# EAGLE board riffle101var (EAGLE 7.2.0), part 1 of 2
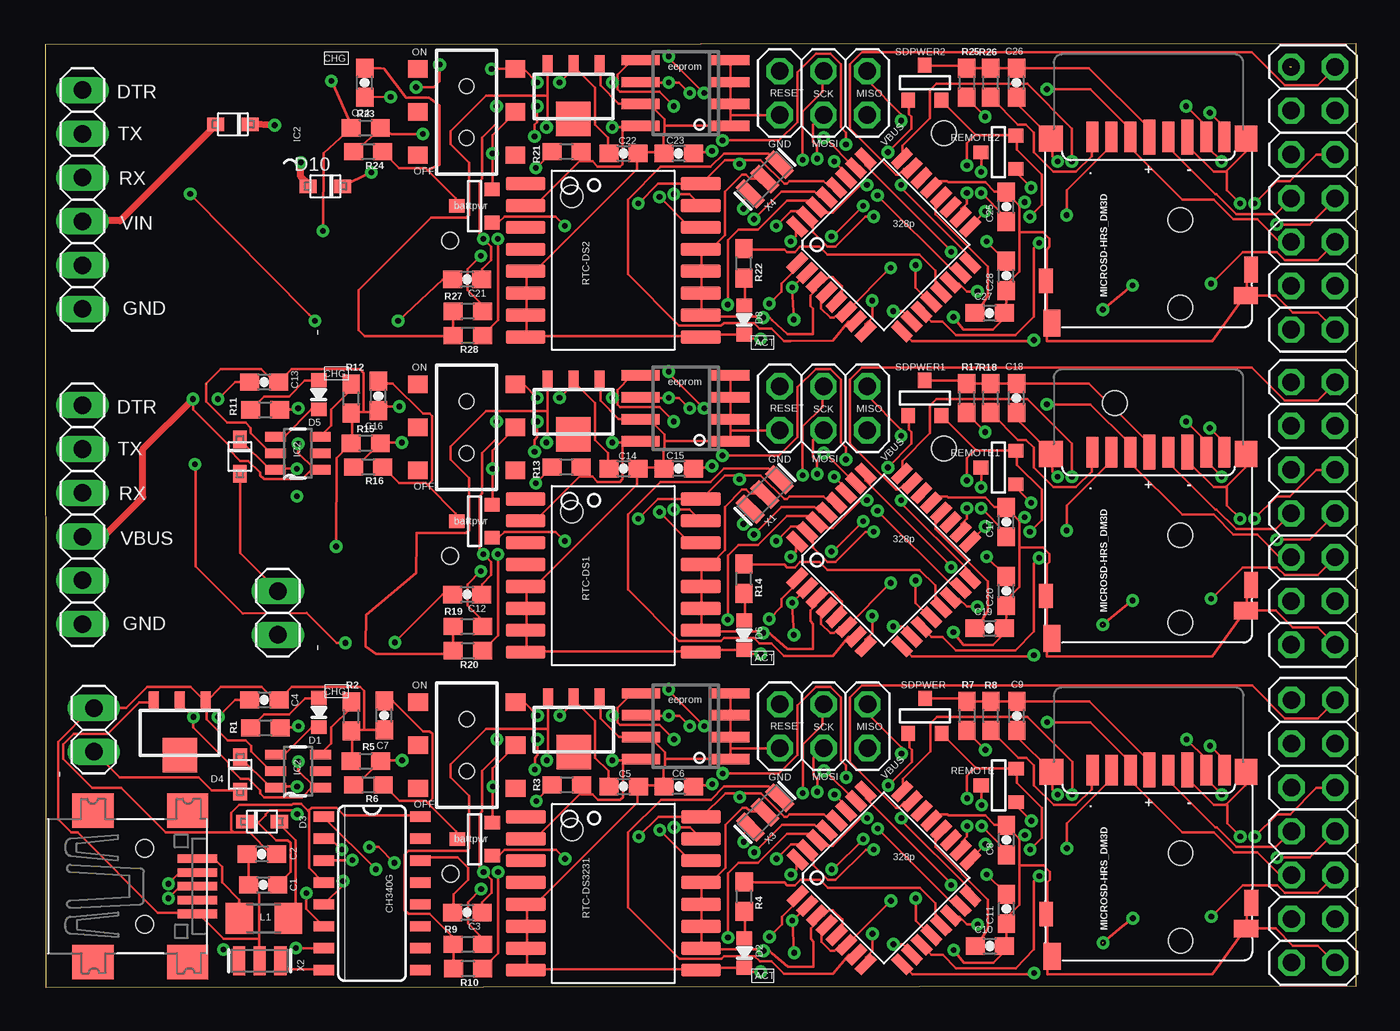
[diagram p0: board, top side]
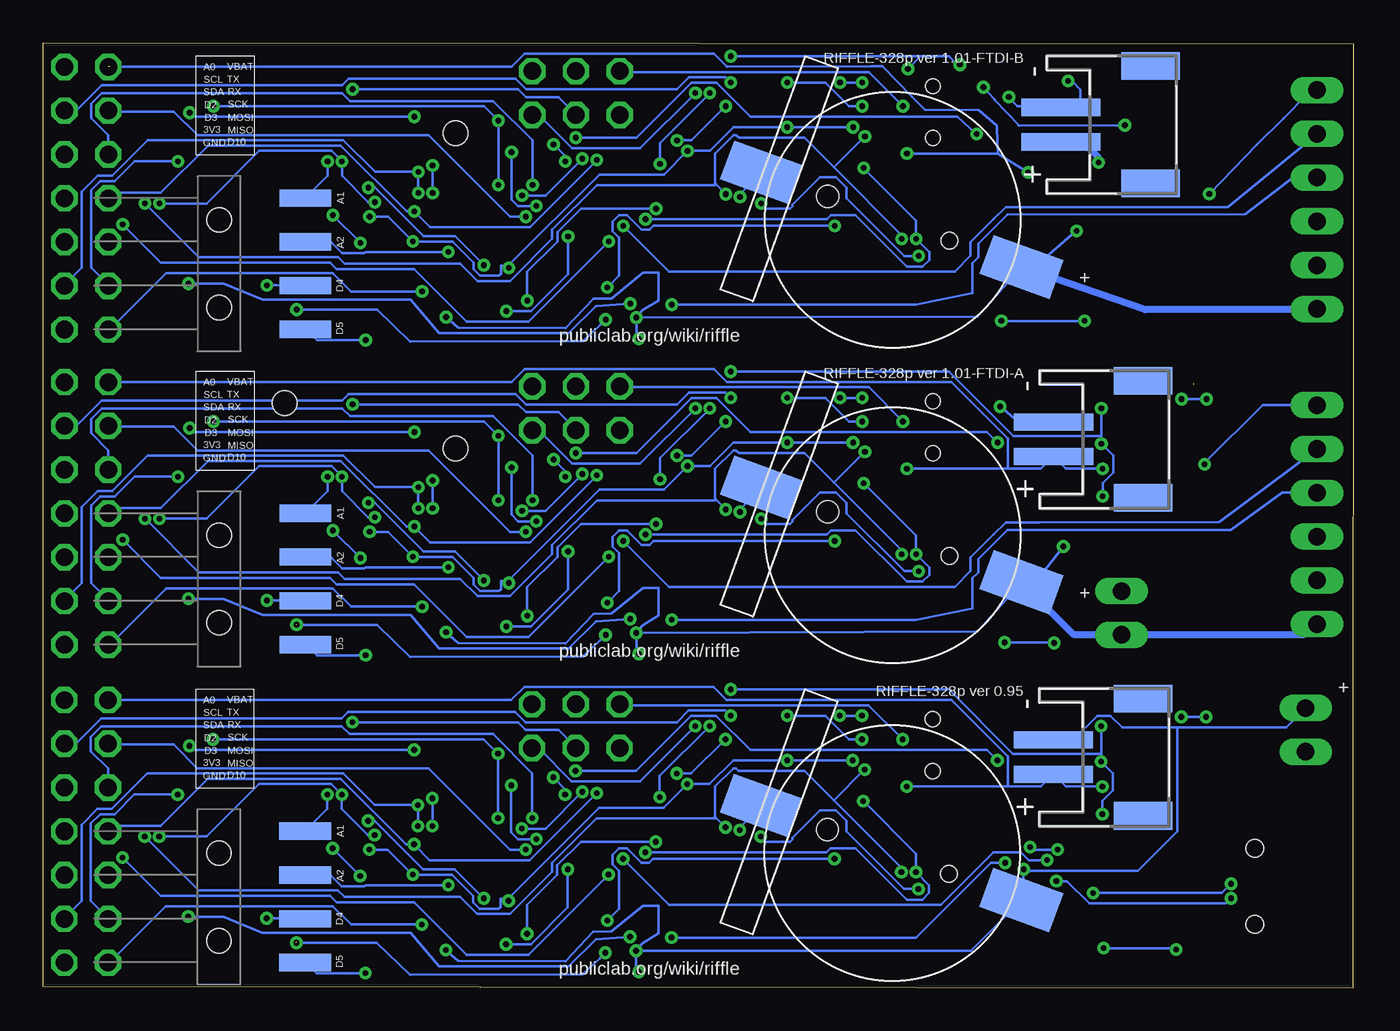
[diagram p1: board, bottom side, seen from below]

Size 76.03 x 54.79 mm. Coordinates in mm from the lower left corner, seen from the top.
Outline: 0,54.73 0.03,0 76.03,0.06 76.03,54.79
Outline: 0.01,54.73 76.01,54.79
Copper layers (1*16): Top 0.035mm / dielectric 1.5mm / Bottom 0.035mm
Design rules "default": minimum track width 10mil, minimum drill 24mil, track to track 8mil, track to pad 8mil, pad to pad 8mil, via to via 8mil, smd to smd 8mil, copper to edge 40mil, drill to drill 8mil, minimum pad ring 10mil, minimum via ring 8mil, stop-mask expansion 4mil, vias tented up to drill 0mil, thermal gap 10mil
Holes 1.4 mm at 62.01,33.91 52.1,31.27 52.1,49.56

## Footprints (pad centres in the part's own frame; a part is rotated, then mirrored left to right if it is on the bottom)
BATTCON_12MM_SMT = smd 2.4 x 4.3: P$1 0,11.96 | smd 2.4 x 4.2: P$2 0,-4.1 | hole 0.95: 0,7.5 | hole 1.25: 0,0
SOT-23 = smd 0.787 x 0.889: 1 0.025,-1.016; 2 -0.94,1.016; 3 0.991,1.016
0603-CAP = smd 1.1 x 1: 1 -0.85,0; 2 0.85,0
JST-PH-2-SMT-RA = smd 1 x 4.6: 1 1,-3.7; 2 -1,-3.7 | smd 1.6 x 3.4: NC1 -3.4,1.5; NC2 3.4,1.5
USB-MINIB = smd 0.5 x 2.308: D+ 0,4.064; D- -0.8,4.064; GND 1.6,4.064; ID 0.8,4.064; VBUS -1.6,4.064 | smd 2 x 2.4: GND1 -4.4,-2; GND2 -4.4,3.5; GND3 4.4,3.5; GND4 4.4,-2 | hole 1: -2.2,1; 2.2,1
0603-LED = smd 0.8 x 0.9: MINUS -0.85,0; PLUS 0.85,0
SOD-323F = smd 1 x 0.8: A -1,0; C 1,0
TQFP32-08 = smd 1.27 x 0.559: 1 -4.293,2.8; 2 -4.293,2; 3 -4.293,1.2; 4 -4.293,0.4; 5 -4.293,-0.4; 6 -4.293,-1.2; 7 -4.293,-2; 8 -4.293,-2.8; 17 4.293,-2.8; 18 4.293,-2; 19 4.293,-1.2; 20 4.293,-0.4; 21 4.293,0.4; 22 4.293,1.2; 23 4.293,2; 24 4.293,2.8 | smd 0.559 x 1.27: 9 -2.8,-4.293; 10 -2,-4.293; 11 -1.2,-4.293; 12 -0.4,-4.293; 13 0.4,-4.293; 14 1.2,-4.293; 15 2,-4.293; 16 2.8,-4.293; 25 2.8,4.293; 26 2,4.293; 27 1.2,4.293; 28 0.4,4.293; 29 -0.4,4.293; 30 -1.2,4.293; 31 -2,4.293; 32 -2.8,4.293
SOT23-5 = smd 0.55 x 1.2: 1 -0.95,-1.3; 2 0,-1.3; 3 0.95,-1.3; 4 0.95,1.3; 5 -0.95,1.3; 6 0,1.3
SO16 = smd 0.6 x 1.2: 1 -4.445,-2.8; 2 -3.175,-2.8; 3 -1.905,-2.8; 4 -0.635,-2.8; 5 0.635,-2.8; 6 1.905,-2.8; 7 3.175,-2.8; 8 4.445,-2.8; 9 4.445,2.8; 10 3.175,2.8; 11 1.905,2.8; 12 0.635,2.8; 13 -0.635,2.8; 14 -1.905,2.8; 15 -3.175,2.8; 16 -4.445,2.8
SOT89 = smd 0.58 x 1.2: 1 -1.5,-1.8; 2 0,-1.8; 3 1.5,-1.8 | smd 2 x 2: 4 0,1.3
SO-08 = smd 0.6 x 2.2: 1 -1.905,-2.6; 2 -0.635,-2.6; 3 0.635,-2.6; 4 1.905,-2.6; 5 1.905,2.6; 6 0.635,2.6; 7 -0.635,2.6; 8 -1.905,2.6
2X03 = drill 1.016 octagon: 1 -2.54,-1.27; 2 -2.54,1.27; 3 0,-1.27; 4 0,1.27; 5 2.54,-1.27; 6 2.54,1.27
AYZ0202 = smd 1 x 1.15: 1 -2.5,2.825; 2 0,2.825; 3 2.5,2.825; 4 -2.5,-2.825; 5 0,-2.825; 6 2.5,-2.825 | hole 0.85: 1.5,0; -1.5,0
1X02 = drill 1.016 long: 1 -1.27,0; 2 1.27,0
1X04-SMD = smd 1 x 3: 1 -3.81,5; 2 -1.27,5; 3 1.27,5; 4 3.81,5 | hole 1.4: -2.54,0; 2.54,0
2X07 = drill 1.016 octagon: 1 -7.62,-1.27; 2 -7.62,1.27; 3 -5.08,-1.27; 4 -5.08,1.27; 5 -2.54,-1.27; 6 -2.54,1.27; 7 0,-1.27; 8 0,1.27; 9 2.54,-1.27; 10 2.54,1.27; 11 5.08,-1.27; 12 5.08,1.27; 13 7.62,-1.27; 14 7.62,1.27
1X06 = drill 1.016 long: 1 -6.35,0; 2 -3.81,0; 3 -1.27,0; 4 1.27,0; 5 3.81,0; 6 6.35,0
R1206 = smd 1.6 x 1.803: 1 -1.422,0; 2 1.422,0
0603-NO = smd 1.1 x 1: 1 -0.85,0; 2 0.85,0
DS3231 = smd 0.762 x 2.286: 1 -4.445,-5.08; 2 -3.175,-5.08; 3 -1.905,-5.08; 4 -0.635,-5.08; 5 0.635,-5.08; 6 1.905,-5.08; 7 3.175,-5.08; 8 4.445,-5.08; 9 4.445,5.08; 10 3.175,5.08; 11 1.905,5.08; 12 0.635,5.08; 13 -0.635,5.08; 14 -1.905,5.08; 15 -3.175,5.08; 16 -4.445,5.08
DM3D = smd 0.7 x 1.75: CD/DAT3 8.15,0.45; CLK 4.85,0.45; CMD 7.05,0.45; DAT0 2.65,0.45; DAT1 1.6,0.45; DAT2 9.25,0.45 | smd 0.8 x 1.5: GND1 0.05,8.15 | smd 0.8 x 1.4: GND2 11.95,8.8 | smd 1.4 x 1.5: GND3 11.65,0.55 | smd 1.3 x 1.5: GND4 0.35,0.55 | smd 1 x 1.55: SW_A 11.6,11.25 | smd 1.4 x 1: SW_B 0.35,9.65 | smd 0.7 x 2.032: VDD 5.95,0.45; VSS 3.75,0.45
RESONATOR-SMD = smd 0.7 x 1.7: 1 -1.2,0; 2 0,0; 3 1.2,0

## Placement (x,y rotation side)
BAT  CR1220  [BATTCON_12MM_SMT]  30.53,9.16 250 bottom
BAT1  CR1220  [BATTCON_12MM_SMT]  30.51,27.6 250 bottom
BAT2  CR1220  [BATTCON_12MM_SMT]  30.51,45.89 250 bottom
BATTPOWER  FDN340P  [SOT-23]  24.88,8.64 270 top
BATTPOWER1  FDN340P  [SOT-23]  24.87,27.08 270 top
BATTPOWER2  FDN340P  [SOT-23]  24.87,45.37 270 top
C1  10uF  [0603-CAP]  12.61,5.96 0 top
C2  0.1uF  [0603-CAP]  12.54,7.74 180 top
C3  0.1uF  [0603-CAP]  24.45,4.36 180 top
C4  10uF  [0603-CAP]  12.68,16.69 0 top
C5  10uF  [0603-CAP]  33.53,11.66 0 top
C6  10uF  [0603-CAP]  36.73,11.66 180 top
C7  0.1uF  [0603-CAP]  19.64,15.79 90 top
C8  0.1uF  [0603-CAP]  55.73,8.56 90 top
C9  0.1uF  [0603-CAP]  56.33,15.76 90 top
C10  0.1uF  [0603-CAP]  54.76,2.41 0 top
C11  0.1uF  [0603-CAP]  55.73,4.56 90 top
C12  0.1uF  [0603-CAP]  24.44,22.8 180 top
C13  10uF  [0603-CAP]  12.67,35.13 0 top
C14  10uF  [0603-CAP]  33.51,30.1 0 top
C15  10uF  [0603-CAP]  36.71,30.1 180 top
C16  0.1uF  [0603-CAP]  19.29,34.32 90 top
C17  0.1uF  [0603-CAP]  55.71,27 90 top
C18  0.1uF  [0603-CAP]  56.31,34.2 90 top
C19  0.1uF  [0603-CAP]  54.75,20.85 0 top
C20  0.1uF  [0603-CAP]  55.71,23 90 top
C21  0.1uF  [0603-CAP]  24.44,41.08 180 top
C22  10uF  [0603-CAP]  33.51,48.39 0 top
C23  10uF  [0603-CAP]  36.71,48.39 180 top
C24  0.1uF  [0603-CAP]  18.51,52.5 90 top
C25  0.1uF  [0603-CAP]  55.71,45.29 90 top
C26  0.1uF  [0603-CAP]  56.31,52.49 90 top
C27  0.1uF  [0603-CAP]  54.75,39.14 0 top
C28  0.1uF  [0603-CAP]  55.71,41.29 90 top
CN1  [JST-PH-2-SMT-RA]  13.73,13.36 270 bottom
CN2  [USB-MINIB]  4.74,5.88 270 top
CN3  [JST-PH-2-SMT-RA]  13.71,31.8 270 bottom
CN4  [JST-PH-2-SMT-RA]  13.29,50.05 270 bottom
D1  LED0603  [0603-LED]  15.85,15.96 90 top
D2  LED0603  [0603-LED]  40.53,2 90 top
D3  [SOD-323F]  12.55,9.63 180 top
D4  [SOD-323F]  11.28,12.37 90 top
D5  LED0603  [0603-LED]  15.84,34.4 90 top
D6  LED0603  [0603-LED]  40.52,20.44 90 top
D7  [SOD-323F]  11.26,30.81 90 top
D8  LED0603  [0603-LED]  40.52,38.73 90 top
D9  [SOD-323F]  10.86,50.08 0 top
D10  [SOD-323F]  16.22,46.48 0 top
IC1  ATMEGA328P  [TQFP32-08]  48.63,6.36 45 top
IC2  MCP73831  [SOT23-5]  14.64,12.55 270 top
IC3  CH340G  [SO16]  18.93,5.46 270 top
IC4  MCP1700-33  [SOT89]  30.63,14.96 180 top
IC5  24AA128SN  [SO-08]  37.13,15.16 90 top
IC6  MCP1700-33  [SOT89]  7.77,14.78 180 top
IC7  MCP73831  [SOT23-5]  14.63,30.99 270 top
IC8  ATMEGA328P  [TQFP32-08]  48.61,24.8 45 top
IC9  MCP1700-33  [SOT89]  30.61,33.4 180 top
IC10  24AA128SN  [SO-08]  37.11,33.6 90 top
IC11  ATMEGA328P  [TQFP32-08]  48.61,43.09 45 top
IC12  MCP1700-33  [SOT89]  30.61,51.69 180 top
IC13  24AA128SN  [SO-08]  37.11,51.89 90 top
ISP  [2X03]  45.13,15.16 180 top
ISP1  [2X03]  45.11,33.6 180 top
ISP2  [2X03]  45.11,51.89 180 top
J1  AYZ0202  [AYZ0202]  24.43,14.06 270 top
J2  AYZ0202  [AYZ0202]  24.41,32.5 270 top
J3  AYZ0202  [AYZ0202]  24.41,50.79 270 top
JP1  [1X02]  2.79,14.95 270 top
JP2  [1X02]  13.47,21.74 90 top
JP3  [1X04-SMD]  65.83,5.26 270 bottom
JP4  [1X04-SMD]  65.81,23.7 270 bottom
JP5  [2X07]  73.53,9.06 90 top
JP6  [2X07]  73.51,27.5 90 top
JP7  [1X06]  2.13,27.43 90 top
JP8  [1X04-SMD]  65.81,41.99 270 bottom
JP9  [2X07]  73.51,45.79 90 top
JP10  [1X06]  2.13,45.72 90 top
L1  500mA  [R1206]  12.65,4.02 0 top
R1  10K  [0603-NO]  12.74,15.07 0 top
R2  4.7K  [0603-NO]  17.73,15.73 90 top
R3  10K  [0603-NO]  30.23,11.76 0 top
R4  10K  [0603-NO]  40.52,5.28 90 top
R5  10K  [0603-NO]  18.57,13.14 0 top
R6  10K  [0603-NO]  18.71,11.76 0 top
R7  50K  [0603-NO]  53.43,15.76 270 top
R8  50K  [0603-NO]  54.83,15.76 90 top
R9  10K  [0603-NO]  24.49,2.51 180 top
R10  10K  [0603-NO]  24.5,1.1 180 top
R11  10K  [0603-NO]  12.73,33.51 0 top
R12  4.7K  [0603-NO]  17.72,34.17 90 top
R13  10K  [0603-NO]  30.21,30.2 0 top
R14  10K  [0603-NO]  40.5,23.72 90 top
R15  10K  [0603-NO]  18.56,31.58 0 top
R16  10K  [0603-NO]  18.7,30.2 0 top
R17  50K  [0603-NO]  53.41,34.2 270 top
R18  50K  [0603-NO]  54.81,34.2 90 top
R19  10K  [0603-NO]  24.48,20.95 180 top
R20  10K  [0603-NO]  24.49,19.54 180 top
R21  10K  [0603-NO]  30.21,48.49 0 top
R22  10K  [0603-NO]  40.5,42.01 90 top
R23  10K  [0603-NO]  18.56,49.87 0 top
R24  10K  [0603-NO]  18.7,48.49 0 top
R25  50K  [0603-NO]  53.41,52.49 270 top
R26  50K  [0603-NO]  54.81,52.49 90 top
R27  10K  [0603-NO]  24.48,39.24 180 top
R28  10K  [0603-NO]  24.49,37.83 180 top
REMOTE  FDN340P  [SOT-23]  55.27,11.75 270 top
REMOTE1  FDN340P  [SOT-23]  55.26,30.19 270 top
REMOTE2  FDN340P  [SOT-23]  55.26,48.48 270 top
RTC-DS1  DS3231  [DS3231]  32.91,23.9 270 top
RTC-DS2  DS3231  [DS3231]  32.91,42.19 270 top
RTC-DS3231  DS3231  [DS3231]  32.93,5.46 270 top
SDPWER  FDN340P  [SOT-23]  51.03,15.76 180 top
SDPWER1  FDN340P  [SOT-23]  51.01,34.2 180 top
SDPWER2  FDN340P  [SOT-23]  51.01,52.49 180 top
U$1  MICROSD-HRS_DM3D  [DM3D]  69.98,13.07 180 top
U$2  MICROSD-HRS_DM3D  [DM3D]  69.96,31.51 180 top
U$3  MICROSD-HRS_DM3D  [DM3D]  69.96,49.8 180 top
X1  16 MHz  [RESONATOR-SMD]  41.71,28.6 225 top
X2  12MHz  [RESONATOR-SMD]  12.41,1.55 0 top
X3  16 MHz  [RESONATOR-SMD]  41.73,10.16 225 top
X4  16 MHz  [RESONATOR-SMD]  41.71,46.89 225 top

## Library data of the parts
BAT BAT1 BAT2 IC2 IC3 IC7 J1-J3 X2 = SparkFunNew
BATTPOWER BATTPOWER1 BATTPOWER2 REMOTE REMOTE1 REMOTE2 SDPWER SDPWER1 SDPWER2 = zetex; OC_FARNELL: unknown; OC_NEWARK: unknown
C1-C28 JP3 JP4 JP8 X1 X3 X4 = SparkFun
CN1-CN4 D3 D4 D7 D9 D10 IC4 IC6 IC9 IC12 L1 = adafruit
D1 D2 D5 D6 D8 = LowPowerLab
IC1 IC8 IC11 = atmel; MPN: ATMEGA8-16AU; OC_FARNELL: 9171371; OC_NEWARK: 73M8863
IC5 IC10 IC13 = microchip; MF: MICROCHIP; MPN: 24AA128-I/SN; OC_FARNELL: unknown; OC_NEWARK: 92C6842
ISP ISP1 ISP2 JP1 JP2 JP5-JP7 JP9 JP10 = pinhead
R1-R28 = microbuilder
RTC-DS1 RTC-DS2 RTC-DS3231 = _lh-library
U$1-U$3 = hrs_DM3D-SF

## Nets
A0: IC1.23 JP5.13
A1: IC1.24 JP3.1
A2: IC1.25 JP3.2
A3: IC1.26 R5.2 R6.1
A4: IC8.23 JP6.13
A5: IC8.25 JP4.2
A6: IC8.26 R15.2 R16.1
A7: IC8.24 JP4.1
A8: IC11.23 JP9.13
A9: IC11.25 JP8.2
A10: IC11.26 R23.2 R24.1
A11: IC11.24 JP8.1
AREF: C10.1 IC1.20
AREF1: C19.1 IC8.20
AREF2: C27.1 IC11.20
D1: IC8.13 R14.2
D2: IC1.32 JP5.7
D3: IC1.1 JP5.5
D4: BATTPOWER.3 IC1.2 JP3.3
D5: IC1.9 JP3.4
D6: IC1.10 SDPWER.3
D7: IC1.11 U$1.CD/DAT3
D8: IC1.12 REMOTE.3
D9: IC1.13 R4.2
D10: IC1.14 JP5.2
D11: BATTPOWER1.3 IC8.2 JP4.3
D12: IC8.12 REMOTE1.3
D13: IC8.1 JP6.5
D14: IC8.9 JP4.4
D15: IC8.10 SDPWER1.3
D16: IC8.11 U$2.CD/DAT3
D17: IC8.32 JP6.7
D18: IC8.14 JP6.2
D19: IC11.13 R22.2
D20: BATTPOWER2.3 IC11.2 JP8.3
D21: IC11.12 REMOTE2.3
D22: IC11.1 JP9.5
D23: IC11.9 JP8.4
D24: IC11.10 SDPWER2.3
D25: IC11.11 U$3.CD/DAT3
D26: IC11.32 JP9.7
D27: IC11.14 JP9.2
D+: CN2.D+ IC3.5
D-: CN2.D- IC3.6
GND: BAT.P$1 C1.1 C2.2 C4.2 C5.2 C6.2 C7.1 C8.2 C9.1 C10.2 C11.1 CN1.2 CN2.GND D2.MINUS IC1.3 IC1.5 IC1.21 IC2.2 IC3.1 IC4.1 IC5.1 IC5.2 IC5.3 IC5.4 IC5.7 IC6.1 ISP.6 JP1.1 JP5.1 R2.1 R5.1 RTC-DS3231.5 RTC-DS3231.6 RTC-DS3231.7 RTC-DS3231.8 RTC-DS3231.9 RTC-DS3231.10 RTC-DS3231.11 RTC-DS3231.12 RTC-DS3231.13 U$1.GND1 U$1.GND2 U$1.GND3 U$1.GND4 U$1.SW_A U$1.SW_B U$1.VSS X2.2 X3.2
GND1: BAT1.P$1 C13.2 C14.2 C15.2 C16.1 C17.2 C18.1 C19.2 C20.1 CN3.2 D6.MINUS IC7.2 IC8.3 IC8.5 IC8.21 IC9.1 IC10.1 IC10.2 IC10.3 IC10.4 IC10.7 ISP1.6 JP2.1 JP6.1 JP7.1 R12.1 R15.1 RTC-DS1.5 RTC-DS1.6 RTC-DS1.7 RTC-DS1.8 RTC-DS1.9 RTC-DS1.10 RTC-DS1.11 RTC-DS1.12 RTC-DS1.13 U$2.GND1 U$2.GND2 U$2.GND3 U$2.GND4 U$2.SW_A U$2.SW_B U$2.VSS X1.2
GND2: BAT2.P$1 C22.2 C23.2 C24.1 C25.2 C26.1 C27.2 C28.1 CN4.2 D8.MINUS IC11.3 IC11.5 IC11.21 IC12.1 IC13.1 IC13.2 IC13.3 IC13.4 IC13.7 ISP2.6 JP9.1 JP10.1 R23.1 RTC-DS2.5 RTC-DS2.6 RTC-DS2.7 RTC-DS2.8 RTC-DS2.9 RTC-DS2.10 RTC-DS2.11 RTC-DS2.12 RTC-DS2.13 U$3.GND1 U$3.GND2 U$3.GND3 U$3.GND4 U$3.SW_A U$3.SW_B U$3.VSS X4.2
MISO: IC1.16 ISP.1 JP5.4 U$1.DAT0
MISO1: IC8.16 ISP1.1 JP6.4 U$2.DAT0
MISO2: IC11.16 ISP2.1 JP9.4 U$3.DAT0
MOSI: IC1.15 ISP.4 JP5.6 U$1.CMD
MOSI1: IC8.15 ISP1.4 JP6.6 U$2.CMD
MOSI2: IC11.15 ISP2.4 JP9.6 U$3.CMD
N$1: D1.PLUS R1.1
N$2: IC1.7 X3.1
N$3: IC1.8 X3.3
N$4: C9.2 R7.1 R8.2 SDPWER.1 U$1.VDD
N$5: D1.MINUS IC2.1
N$6: IC2.5 R2.2
N$7: C8.1 JP5.3 REMOTE.1
N$8: C2.1 IC3.4 IC3.16 IC6.3
N$9: D5.MINUS IC7.1
N$10: D3.A L1.2
N$11: IC3.7 X2.1
N$12: IC7.5 R12.2
N$13: IC3.8 X2.3
N$14: D4.A JP1.2
N$15: BATTPOWER.1 C7.2 R6.2
N$16: R7.2 U$1.DAT1
N$17: D2.PLUS R4.1
N$18: R8.1 U$1.DAT2
N$19: CN2.VBUS L1.1
N$20: IC8.7 X1.1
N$21: IC8.8 X1.3
N$22: C17.1 JP6.3 REMOTE1.1
N$23: BATTPOWER1.1 C16.2 R16.2
N$24: R17.2 U$2.DAT1
N$25: R18.1 U$2.DAT2
N$26: C18.2 R17.1 R18.2 SDPWER1.1 U$2.VDD
N$27: D6.PLUS R14.1
N$28: D7.A JP2.2
N$29: D5.PLUS R11.1
N$30: IC11.7 X4.1
N$31: IC11.8 X4.3
N$32: C25.1 JP9.3 REMOTE2.1
N$33: BATTPOWER2.1 C24.2 R24.2
N$34: R25.2 U$3.DAT1
N$35: R26.1 U$3.DAT2
N$36: C26.2 R25.1 R26.2 SDPWER2.1 U$3.VDD
N$37: D8.PLUS R22.1
N$38: D9.A JP10.3
N$39: CN4.1 D10.A
RESET: C3.1 IC1.29 ISP.5 R3.1
RESET1: C12.1 IC8.29 ISP1.5 R13.1
RESET2: C21.1 IC11.29 ISP2.5 R21.1
RST: C3.2 IC3.14
RST1: C12.2 JP7.6
RST2: C21.2 JP10.6
RTC_BATT: BAT.P$2 RTC-DS3231.14
RTC_BATT1: BAT1.P$2 RTC-DS1.14
RTC_BATT2: BAT2.P$2 RTC-DS2.14
RXD: IC1.30 IC3.2 JP5.10
RXD1: IC8.30 JP6.10 JP7.4
RXD2: IC11.30 JP9.10 JP10.4
SCK: IC1.17 ISP.3 JP5.8 U$1.CLK
SCK1: IC8.17 ISP1.3 JP6.8 U$2.CLK
SCK2: IC11.17 ISP2.3 JP9.8 U$3.CLK
SCL: IC1.28 IC5.6 JP5.11 R9.1 RTC-DS3231.16
SCL1: IC8.28 IC10.6 JP6.11 R19.1 RTC-DS1.16
SCL2: IC11.28 IC13.6 JP9.11 R27.1 RTC-DS2.16
SDA: IC1.27 IC5.5 JP5.9 R10.1 RTC-DS3231.15
SDA1: IC8.27 IC10.5 JP6.9 R20.1 RTC-DS1.15
SDA2: IC11.27 IC13.5 JP9.9 R28.1 RTC-DS2.15
TXD: IC1.31 IC3.3 JP5.12
TXD1: IC8.31 JP6.12 JP7.5
TXD2: IC11.31 JP9.12 JP10.5
VBAT [vcc]: BATTPOWER.2 CN1.1 D4.C IC2.3 J1.2 JP5.14
VBAT1 [vcc]: BATTPOWER1.2 CN3.1 D7.C IC7.3 J2.2 JP6.14
VBAT2 [vcc]: BATTPOWER2.2 D10.C J3.2 JP9.14
VBUS [vcc]: C1.2 C4.1 D3.C IC2.4 IC6.2 ISP.2 R1.2
VBUS1 [vcc]: C13.1 IC7.4 ISP1.2 JP7.3 R11.2
VCC: C6.1 C11.2 IC1.4 IC1.6 IC1.18 IC4.3 IC5.8 R3.2 R9.2 R10.2 REMOTE.2 RTC-DS3231.2 SDPWER.2
VCC1: C15.1 C20.2 IC8.4 IC8.6 IC8.18 IC9.3 IC10.8 R13.2 R19.2 R20.2 REMOTE1.2 RTC-DS1.2 SDPWER1.2
VCC2: C23.1 C28.2 IC11.4 IC11.6 IC11.18 IC12.3 IC13.8 R21.2 R27.2 R28.2 REMOTE2.2 RTC-DS2.2 SDPWER2.2
VDD: C5.1 IC4.2 J1.1
VDD1: C14.1 IC9.2 J2.1
VIN [vcc]: C22.1 D9.C IC12.2 ISP2.2 J3.1